# Altium PCB PCB1.PcbDoc (part 1 of 2)
Units mm, origin at the board's own origin, x right, y up, seen from the top; angles counter-clockwise.
Board outline 61.6 x 58.93 mm, 2 copper layers (Top Layer, Bottom Layer); 168 components, 16 nets, 520 pads, 0 vias.
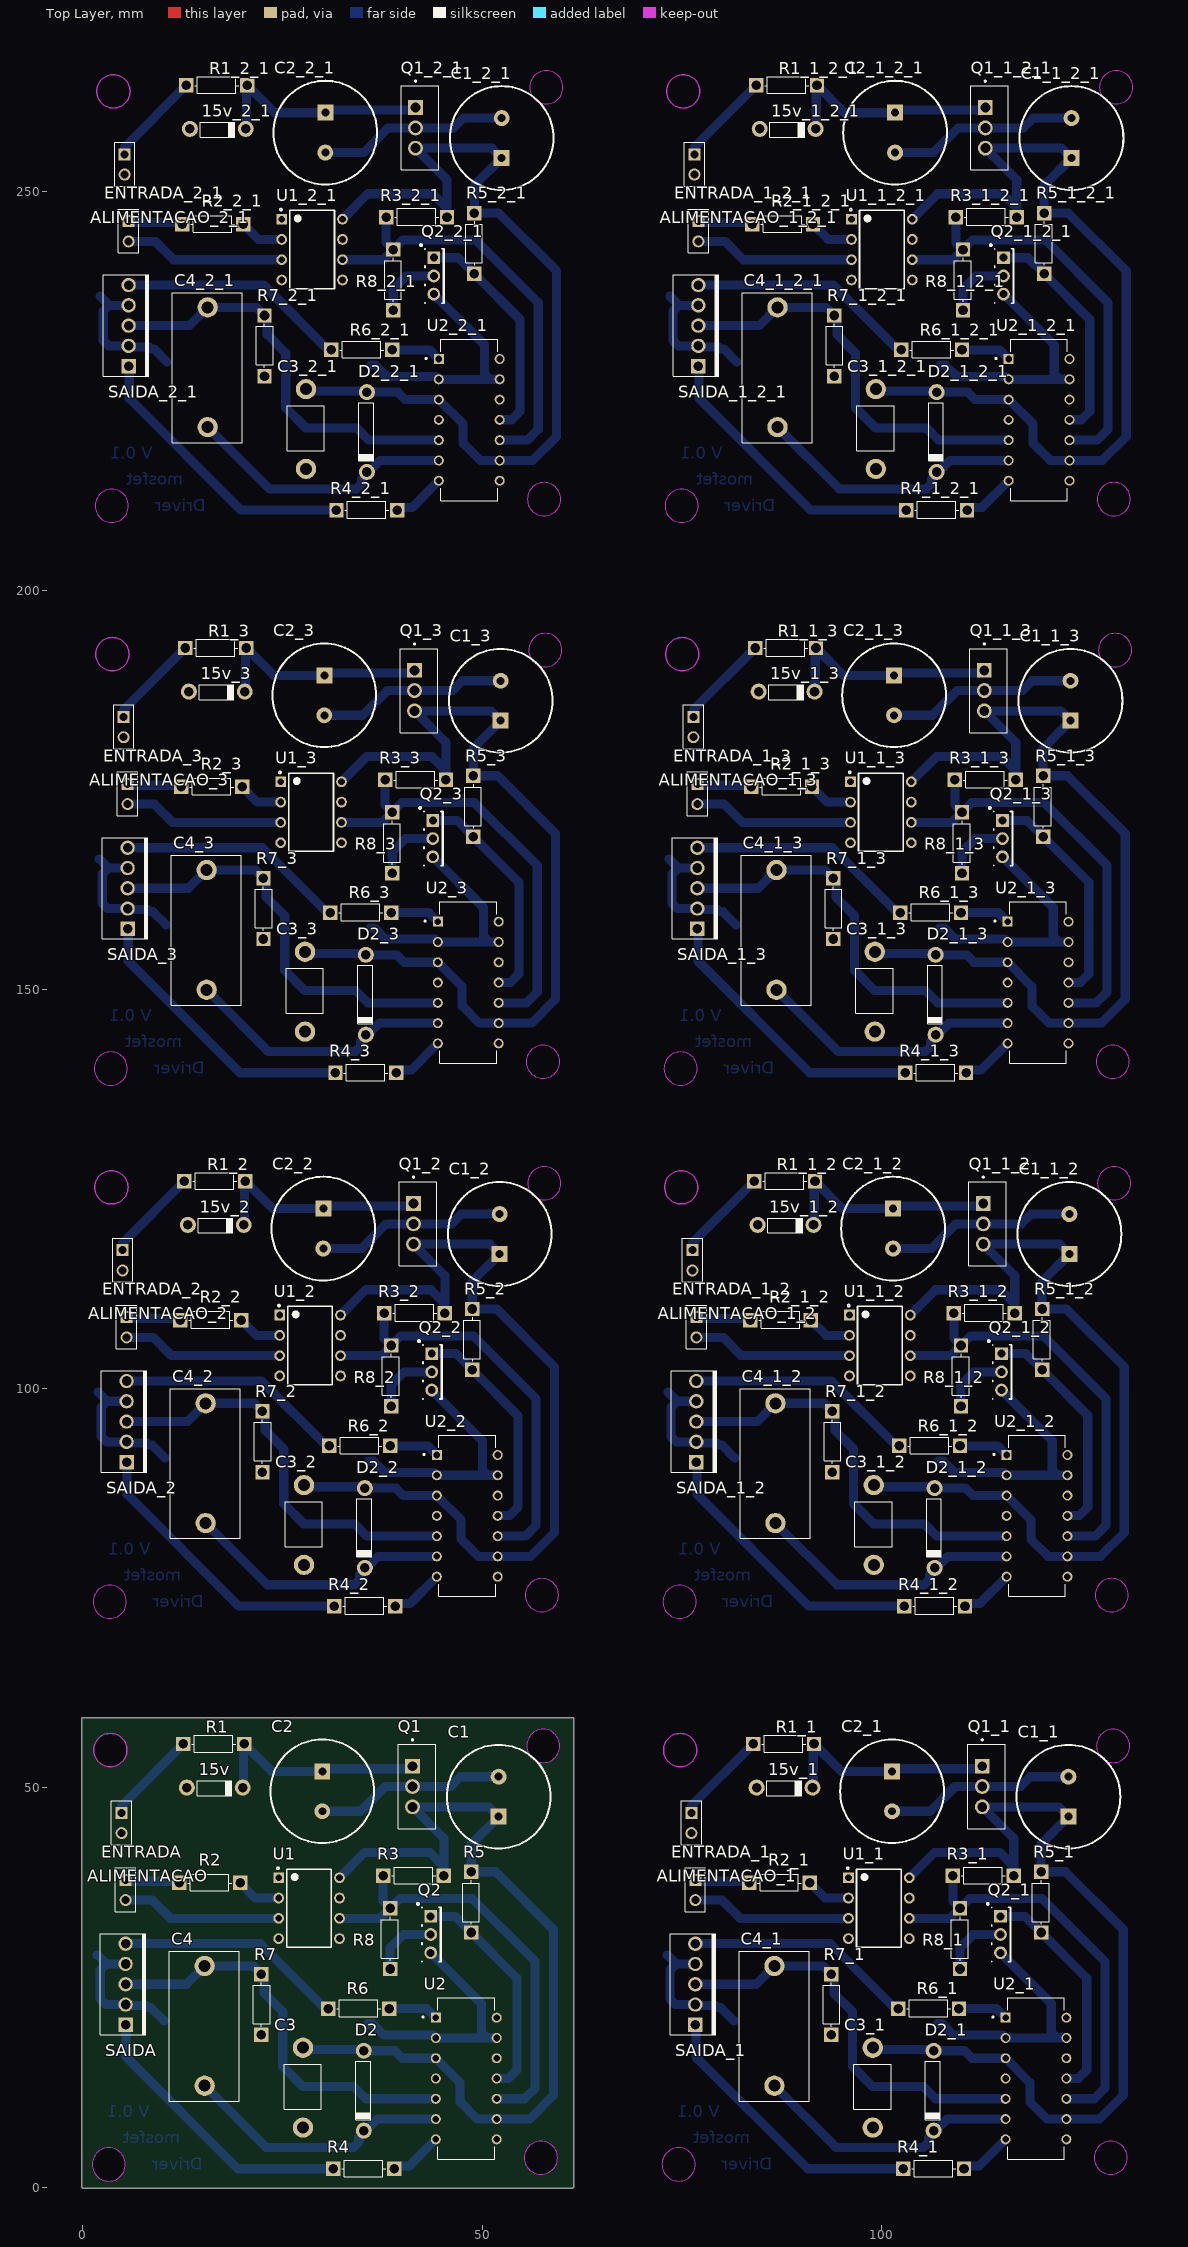
[diagram p0: Top Layer view]
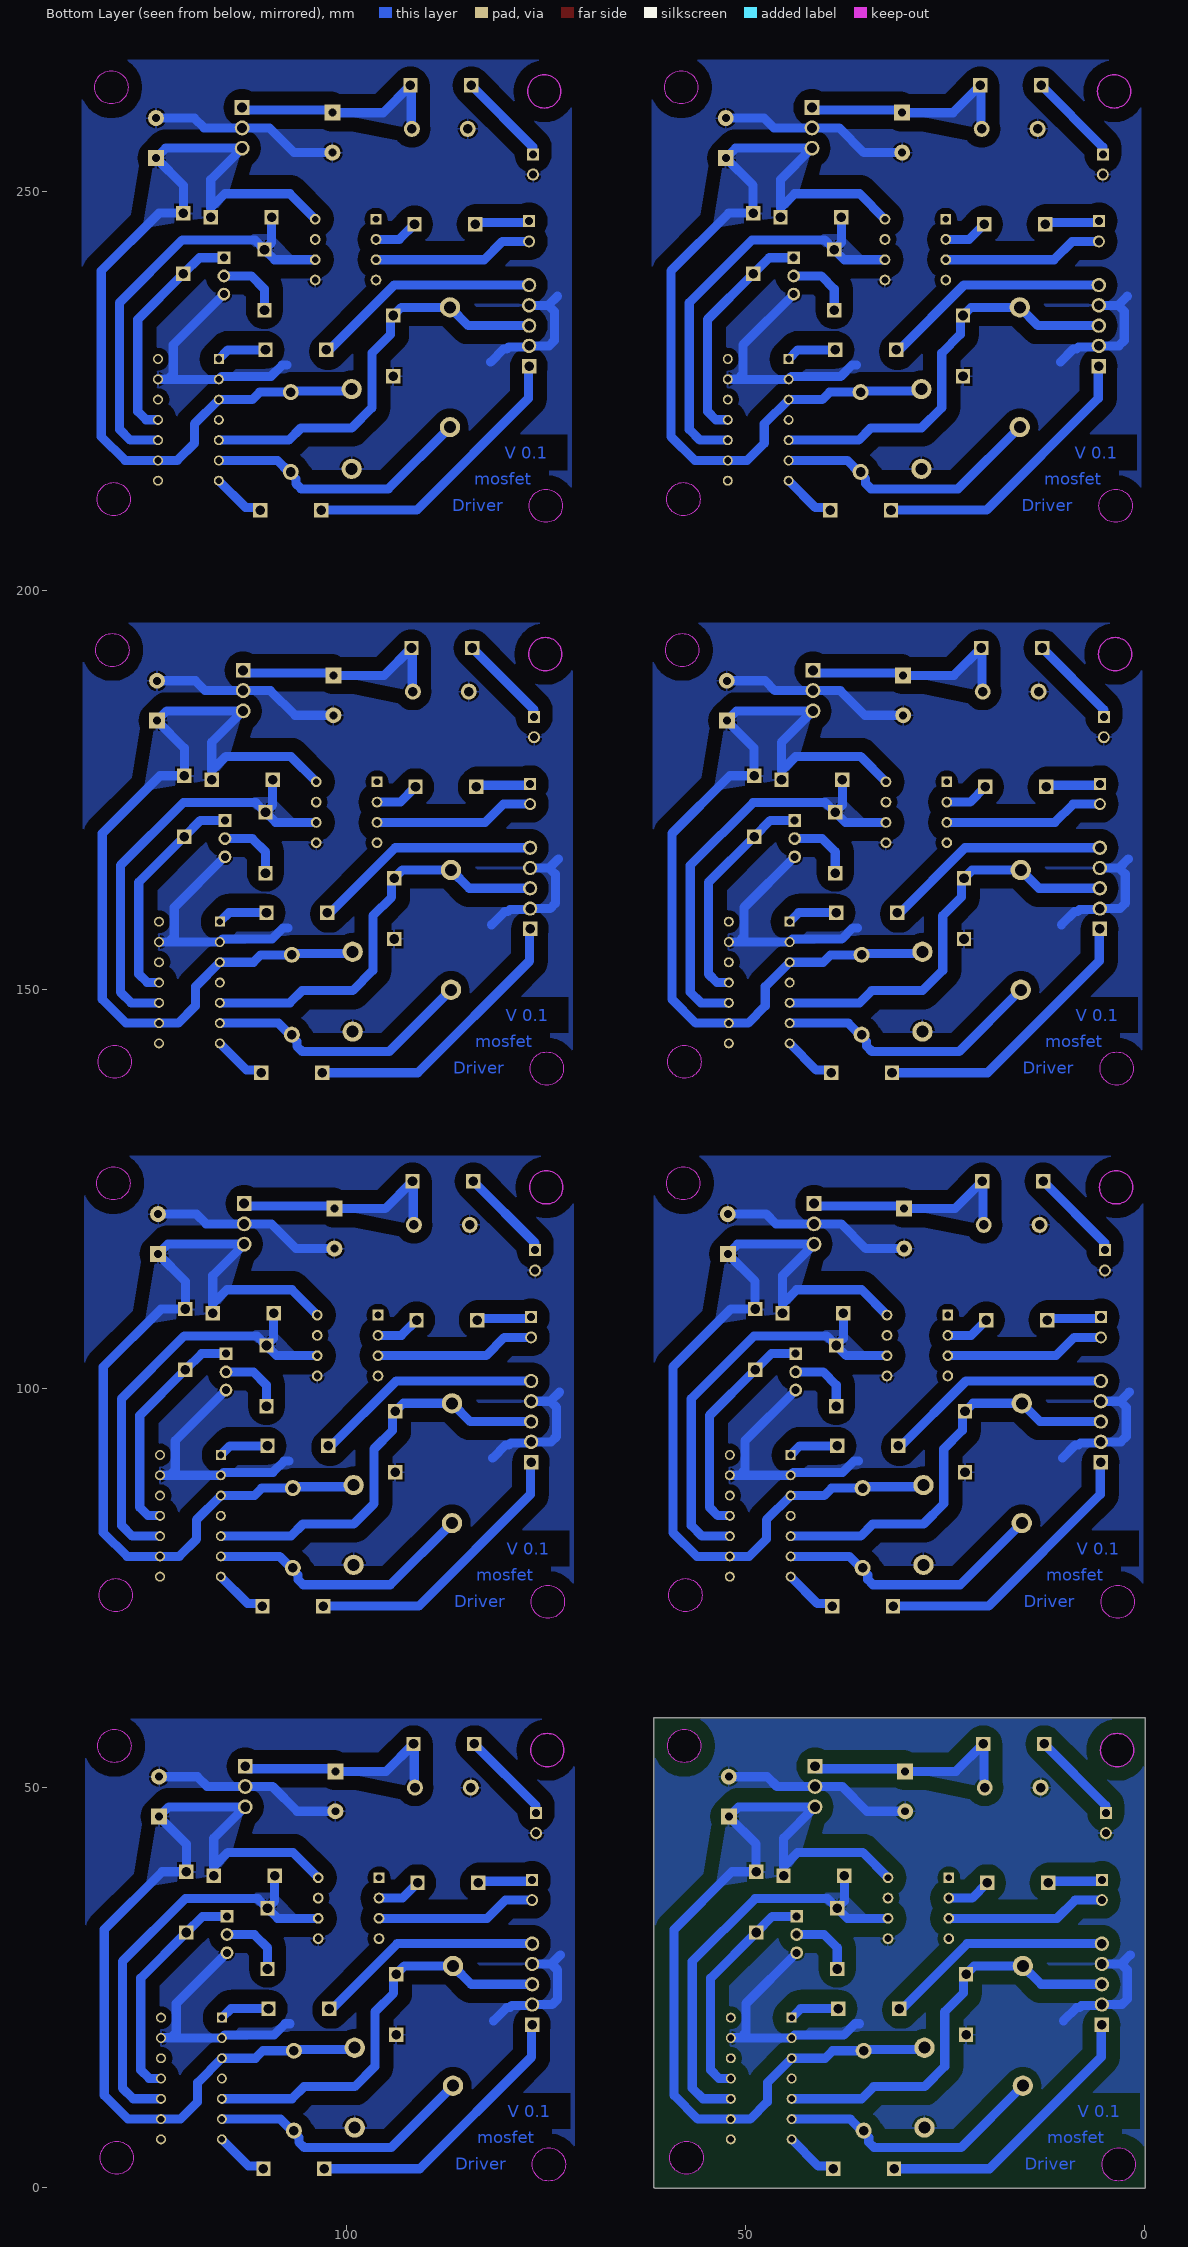
[diagram p1: Bottom Layer view, seen from below]

## Layer stack, top to bottom
Top Solder: solder mask 0.0102, Solder Resist, Dk 3.5
Top Layer: signal copper 0.0356
Dielectric 1: dielectric 0.32, FR-4, Dk 4.8
Bottom Layer: signal copper 0.0356
Bottom Solder: solder mask 0.0102, Solder Resist, Dk 3.5

## Board outline
-0.127,0 -0.127,50.927 -0.127,58.674 cw(c0,58.674) 0,58.801 61.341,58.801 cw(c61.341,58.674) 61.468,58.674 61.468,0 cw(c61.341,0) 61.341,-0.127 0,-0.127 cw(c0,0)
cut-out: 55.54,140.951 ccw(c57.623,140.951) 57.623,138.868 ccw(c57.623,140.951) 59.706,140.951 ccw(c57.623,140.951) 57.623,143.034 ccw(c57.623,140.951)
cut-out: 55.829,192.532 ccw(c57.912,192.532) 57.912,190.449 ccw(c57.912,192.532) 59.995,192.532 ccw(c57.912,192.532) 57.912,194.615 ccw(c57.912,192.532)
cut-out: 55.829,192.532 ccw(c57.912,192.532) 57.912,190.449 ccw(c57.912,192.532) 59.995,192.532 ccw(c57.912,192.532) 57.912,194.615 ccw(c57.912,192.532)
cut-out: 1.405,140.11 ccw(c3.488,140.11) 3.488,138.027 ccw(c3.488,140.11) 5.571,140.11 ccw(c3.488,140.11) 3.488,142.193 ccw(c3.488,140.11)
cut-out: 1.405,140.11 ccw(c3.488,140.11) 3.488,138.027 ccw(c3.488,140.11) 5.571,140.11 ccw(c3.488,140.11) 3.488,142.193 ccw(c3.488,140.11)
cut-out: 1.6,192.024 ccw(c3.683,192.024) 3.683,189.941 ccw(c3.683,192.024) 5.766,192.024 ccw(c3.683,192.024) 3.683,194.107 ccw(c3.683,192.024)
cut-out: 3.683,189.941 cw(c3.683,192.024) 1.6,192.024 cw(c3.683,192.024) 3.683,194.107 cw(c3.683,192.024) 5.766,192.024 cw(c3.683,192.024)
cut-out: 75.057,189.941 cw(c75.057,192.024) 72.974,192.024 cw(c75.057,192.024) 75.057,194.107 cw(c75.057,192.024) 77.14,192.024 cw(c75.057,192.024)
cut-out: 72.974,192.024 ccw(c75.057,192.024) 75.057,189.941 ccw(c75.057,192.024) 77.14,192.024 ccw(c75.057,192.024) 75.057,194.107 ccw(c75.057,192.024)
cut-out: 72.779,140.11 ccw(c74.862,140.11) 74.862,138.027 ccw(c74.862,140.11) 76.945,140.11 ccw(c74.862,140.11) 74.862,142.193 ccw(c74.862,140.11)
cut-out: 72.779,140.11 ccw(c74.862,140.11) 74.862,138.027 ccw(c74.862,140.11) 76.945,140.11 ccw(c74.862,140.11) 74.862,142.193 ccw(c74.862,140.11)
cut-out: 127.203,192.532 ccw(c129.286,192.532) 129.286,190.449 ccw(c129.286,192.532) 131.369,192.532 ccw(c129.286,192.532) 129.286,194.615 ccw(c129.286,192.532)
cut-out: 127.203,192.532 ccw(c129.286,192.532) 129.286,190.449 ccw(c129.286,192.532) 131.369,192.532 ccw(c129.286,192.532) 129.286,194.615 ccw(c129.286,192.532)
cut-out: 126.914,140.951 ccw(c128.997,140.951) 128.997,138.868 ccw(c128.997,140.951) 131.08,140.951 ccw(c128.997,140.951) 128.997,143.034 ccw(c128.997,140.951)
cut-out: 127.041,211.436 ccw(c129.124,211.436) 129.124,209.353 ccw(c129.124,211.436) 131.207,211.436 ccw(c129.124,211.436) 129.124,213.519 ccw(c129.124,211.436)
cut-out: 127.33,263.017 ccw(c129.413,263.017) 129.413,260.934 ccw(c129.413,263.017) 131.496,263.017 ccw(c129.413,263.017) 129.413,265.1 ccw(c129.413,263.017)
cut-out: 127.33,263.017 ccw(c129.413,263.017) 129.413,260.934 ccw(c129.413,263.017) 131.496,263.017 ccw(c129.413,263.017) 129.413,265.1 ccw(c129.413,263.017)
cut-out: 72.906,210.595 ccw(c74.989,210.595) 74.989,208.512 ccw(c74.989,210.595) 77.072,210.595 ccw(c74.989,210.595) 74.989,212.678 ccw(c74.989,210.595)
cut-out: 72.906,210.595 ccw(c74.989,210.595) 74.989,208.512 ccw(c74.989,210.595) 77.072,210.595 ccw(c74.989,210.595) 74.989,212.678 ccw(c74.989,210.595)
cut-out: 73.101,262.509 ccw(c75.184,262.509) 75.184,260.426 ccw(c75.184,262.509) 77.267,262.509 ccw(c75.184,262.509) 75.184,264.592 ccw(c75.184,262.509)
cut-out: 75.184,260.426 cw(c75.184,262.509) 73.101,262.509 cw(c75.184,262.509) 75.184,264.592 cw(c75.184,262.509) 77.267,262.509 cw(c75.184,262.509)
cut-out: 3.81,260.426 cw(c3.81,262.509) 1.727,262.509 cw(c3.81,262.509) 3.81,264.592 cw(c3.81,262.509) 5.893,262.509 cw(c3.81,262.509)
cut-out: 1.727,262.509 ccw(c3.81,262.509) 3.81,260.426 ccw(c3.81,262.509) 5.893,262.509 ccw(c3.81,262.509) 3.81,264.592 ccw(c3.81,262.509)
cut-out: 1.532,210.595 ccw(c3.615,210.595) 3.615,208.512 ccw(c3.615,210.595) 5.698,210.595 ccw(c3.615,210.595) 3.615,212.678 ccw(c3.615,210.595)
cut-out: 1.532,210.595 ccw(c3.615,210.595) 3.615,208.512 ccw(c3.615,210.595) 5.698,210.595 ccw(c3.615,210.595) 3.615,212.678 ccw(c3.615,210.595)
cut-out: 55.956,263.017 ccw(c58.039,263.017) 58.039,260.934 ccw(c58.039,263.017) 60.122,263.017 ccw(c58.039,263.017) 58.039,265.1 ccw(c58.039,263.017)
cut-out: 55.956,263.017 ccw(c58.039,263.017) 58.039,260.934 ccw(c58.039,263.017) 60.122,263.017 ccw(c58.039,263.017) 58.039,265.1 ccw(c58.039,263.017)
cut-out: 55.667,211.436 ccw(c57.75,211.436) 57.75,209.353 ccw(c57.75,211.436) 59.833,211.436 ccw(c57.75,211.436) 57.75,213.519 ccw(c57.75,211.436)
cut-out: 55.413,74.149 ccw(c57.496,74.149) 57.496,72.066 ccw(c57.496,74.149) 59.579,74.149 ccw(c57.496,74.149) 57.496,76.232 ccw(c57.496,74.149)
cut-out: 55.702,125.73 ccw(c57.785,125.73) 57.785,123.647 ccw(c57.785,125.73) 59.868,125.73 ccw(c57.785,125.73) 57.785,127.813 ccw(c57.785,125.73)
cut-out: 55.702,125.73 ccw(c57.785,125.73) 57.785,123.647 ccw(c57.785,125.73) 59.868,125.73 ccw(c57.785,125.73) 57.785,127.813 ccw(c57.785,125.73)
cut-out: 1.278,73.308 ccw(c3.361,73.308) 3.361,71.225 ccw(c3.361,73.308) 5.444,73.308 ccw(c3.361,73.308) 3.361,75.391 ccw(c3.361,73.308)
cut-out: 1.278,73.308 ccw(c3.361,73.308) 3.361,71.225 ccw(c3.361,73.308) 5.444,73.308 ccw(c3.361,73.308) 3.361,75.391 ccw(c3.361,73.308)
cut-out: 1.473,125.222 ccw(c3.556,125.222) 3.556,123.139 ccw(c3.556,125.222) 5.639,125.222 ccw(c3.556,125.222) 3.556,127.305 ccw(c3.556,125.222)
cut-out: 3.556,123.139 cw(c3.556,125.222) 1.473,125.222 cw(c3.556,125.222) 3.556,127.305 cw(c3.556,125.222) 5.639,125.222 cw(c3.556,125.222)
cut-out: 74.93,123.139 cw(c74.93,125.222) 72.847,125.222 cw(c74.93,125.222) 74.93,127.305 cw(c74.93,125.222) 77.013,125.222 cw(c74.93,125.222)
cut-out: 72.847,125.222 ccw(c74.93,125.222) 74.93,123.139 ccw(c74.93,125.222) 77.013,125.222 ccw(c74.93,125.222) 74.93,127.305 ccw(c74.93,125.222)
cut-out: 72.652,73.308 ccw(c74.735,73.308) 74.735,71.225 ccw(c74.735,73.308) 76.818,73.308 ccw(c74.735,73.308) 74.735,75.391 ccw(c74.735,73.308)
cut-out: 72.652,73.308 ccw(c74.735,73.308) 74.735,71.225 ccw(c74.735,73.308) 76.818,73.308 ccw(c74.735,73.308) 74.735,75.391 ccw(c74.735,73.308)
cut-out: 127.076,125.73 ccw(c129.159,125.73) 129.159,123.647 ccw(c129.159,125.73) 131.242,125.73 ccw(c129.159,125.73) 129.159,127.813 ccw(c129.159,125.73)
cut-out: 127.076,125.73 ccw(c129.159,125.73) 129.159,123.647 ccw(c129.159,125.73) 131.242,125.73 ccw(c129.159,125.73) 129.159,127.813 ccw(c129.159,125.73)
cut-out: 126.787,74.149 ccw(c128.87,74.149) 128.87,72.066 ccw(c128.87,74.149) 130.953,74.149 ccw(c128.87,74.149) 128.87,76.232 ccw(c128.87,74.149)
cut-out: 126.66,3.664 ccw(c128.743,3.664) 128.743,1.581 ccw(c128.743,3.664) 130.826,3.664 ccw(c128.743,3.664) 128.743,5.747 ccw(c128.743,3.664)
cut-out: 126.949,55.245 ccw(c129.032,55.245) 129.032,53.162 ccw(c129.032,55.245) 131.115,55.245 ccw(c129.032,55.245) 129.032,57.328 ccw(c129.032,55.245)
cut-out: 126.949,55.245 ccw(c129.032,55.245) 129.032,53.162 ccw(c129.032,55.245) 131.115,55.245 ccw(c129.032,55.245) 129.032,57.328 ccw(c129.032,55.245)
cut-out: 72.525,2.823 ccw(c74.608,2.823) 74.608,0.74 ccw(c74.608,2.823) 76.691,2.823 ccw(c74.608,2.823) 74.608,4.906 ccw(c74.608,2.823)
cut-out: 72.525,2.823 ccw(c74.608,2.823) 74.608,0.74 ccw(c74.608,2.823) 76.691,2.823 ccw(c74.608,2.823) 74.608,4.906 ccw(c74.608,2.823)
cut-out: 72.72,54.737 ccw(c74.803,54.737) 74.803,52.654 ccw(c74.803,54.737) 76.886,54.737 ccw(c74.803,54.737) 74.803,56.82 ccw(c74.803,54.737)
cut-out: 74.803,52.654 cw(c74.803,54.737) 72.72,54.737 cw(c74.803,54.737) 74.803,56.82 cw(c74.803,54.737) 76.886,54.737 cw(c74.803,54.737)
cut-out: 3.429,52.654 cw(c3.429,54.737) 1.346,54.737 cw(c3.429,54.737) 3.429,56.82 cw(c3.429,54.737) 5.512,54.737 cw(c3.429,54.737)
cut-out: 1.346,54.737 ccw(c3.429,54.737) 3.429,52.654 ccw(c3.429,54.737) 5.512,54.737 ccw(c3.429,54.737) 3.429,56.82 ccw(c3.429,54.737)
cut-out: 1.151,2.823 ccw(c3.234,2.823) 3.234,0.74 ccw(c3.234,2.823) 5.317,2.823 ccw(c3.234,2.823) 3.234,4.906 ccw(c3.234,2.823)
cut-out: 1.151,2.823 ccw(c3.234,2.823) 3.234,0.74 ccw(c3.234,2.823) 5.317,2.823 ccw(c3.234,2.823) 3.234,4.906 ccw(c3.234,2.823)
cut-out: 55.575,55.245 ccw(c57.658,55.245) 57.658,53.162 ccw(c57.658,55.245) 59.741,55.245 ccw(c57.658,55.245) 57.658,57.328 ccw(c57.658,55.245)
cut-out: 55.575,55.245 ccw(c57.658,55.245) 57.658,53.162 ccw(c57.658,55.245) 59.741,55.245 ccw(c57.658,55.245) 57.658,57.328 ccw(c57.658,55.245)
cut-out: 55.286,3.664 ccw(c57.369,3.664) 57.369,1.581 ccw(c57.369,3.664) 59.452,3.664 ccw(c57.369,3.664) 57.369,5.747 ccw(c57.369,3.664)

## Design rules (kind name [scope] priority, off if disabled: settings)
Clearance [All] p1: gap=0.254 ignorepadtopadclearanceinfootprint=FALSE except(1.016: Fill-Hole Poly-Hole Region-Hole; 1.27: Fill-Text Poly-Text Region-Text; 1.778: Arc-Fill Arc-Poly Arc-Region Track-Fill Track-Poly Track-Region Fill-Fill Fill-Poly Fill-Region Poly-Poly Poly-Region Region-Region)
PolygonConnect [All] p1: connectstyle=Relief reliefconductorwidth=0.254 reliefentries=4 polygonreliefangle="90 Angle" airgapwidth=0.254
RoutingVias [All] p1: holewidth=0.711 width=1.27 viastyle="Through Hole" minholewidth=0.711 minwidth=1.27 maxholewidth=0.711 maxwidth=1.27
SolderMaskExpansion [All] p1: expansion=0.102
Width [All] p1: maxlimit=1.27 minlimit=0.254 preferedwidth=1.143 toplayer_maxwidth=0.254 toplayer_prefwidth=0.254 bottomlayer_minwidth=1.016 minimp=50.000000 maximp=50.000000 favimp=50.000000
30 further rules are at their usual default settings.

## Classes and differential pairs
component class Sheet1: 15v ALIMENTACAO C2 C3 C4 D2 ENTRADA Q1 Q2 R1 R2 R3 R4 R5 R6 R7 R8 SAIDA U1 U2

## Components (designator, comment, footprint, x,y, rotation, side; value= is the part's Value field where it differs from the comment)
15v "DIO_ZENER_DO35" DIO_PTH_DO35 16.51,50.038 r180 top value=?
15v_1 "DIO_ZENER_DO35" DIO_PTH_DO35 87.884,50.038 r180 top value=? (schematic designator 15v)
15v_1_2 "DIO_ZENER_DO35" DIO_PTH_DO35 88.011,120.523 r180 top value=? (schematic designator 15v)
15v_1_2_1 "DIO_ZENER_DO35" DIO_PTH_DO35 88.265,257.81 r180 top value=? (schematic designator 15v)
15v_1_3 "DIO_ZENER_DO35" DIO_PTH_DO35 88.138,187.325 r180 top value=? (schematic designator 15v)
15v_2 "DIO_ZENER_DO35" DIO_PTH_DO35 16.637,120.523 r180 top value=? (schematic designator 15v)
15v_2_1 "DIO_ZENER_DO35" DIO_PTH_DO35 16.891,257.81 r180 top value=? (schematic designator 15v)
15v_3 "DIO_ZENER_DO35" DIO_PTH_DO35 16.764,187.325 r180 top value=? (schematic designator 15v)
ALIMENTACAO "Entrada" HEADER_1X2 4.84,45.593 r270 top value=?
ALIMENTACAO_1 "Entrada" HEADER_1X2 76.214,45.593 r270 top value=? (schematic designator ALIMENTACAO)
ALIMENTACAO_1_2 "Entrada" HEADER_1X2 76.341,116.078 r270 top value=? (schematic designator ALIMENTACAO)
ALIMENTACAO_1_2_1 "Entrada" HEADER_1X2 76.595,253.365 r270 top value=? (schematic designator ALIMENTACAO)
ALIMENTACAO_1_3 "Entrada" HEADER_1X2 76.468,182.88 r270 top value=? (schematic designator ALIMENTACAO)
ALIMENTACAO_2 "Entrada" HEADER_1X2 4.967,116.078 r270 top value=? (schematic designator ALIMENTACAO)
ALIMENTACAO_2_1 "Entrada" HEADER_1X2 5.221,253.365 r270 top value=? (schematic designator ALIMENTACAO)
ALIMENTACAO_3 "Entrada" HEADER_1X2 5.094,182.88 r270 top value=? (schematic designator ALIMENTACAO)
C1 "Electrolytic Capacitor" CAP_ALU_RADIAL_5MM 52.07,48.895 r90 top value=10F
C1_1 "Electrolytic Capacitor" CAP_ALU_RADIAL_5MM 123.444,48.895 r90 top value=10F (schematic designator C1)
C1_1_2 "Electrolytic Capacitor" CAP_ALU_RADIAL_5MM 123.571,119.38 r90 top value=10F (schematic designator C1)
C1_1_2_1 "Electrolytic Capacitor" CAP_ALU_RADIAL_5MM 123.825,256.667 r90 top value=10F (schematic designator C1)
C1_1_3 "Electrolytic Capacitor" CAP_ALU_RADIAL_5MM 123.698,186.182 r90 top value=10F (schematic designator C1)
C1_2 "Electrolytic Capacitor" CAP_ALU_RADIAL_5MM 52.197,119.38 r90 top value=10F (schematic designator C1)
C1_2_1 "Electrolytic Capacitor" CAP_ALU_RADIAL_5MM 52.451,256.667 r90 top value=10F (schematic designator C1)
C1_3 "Electrolytic Capacitor" CAP_ALU_RADIAL_5MM 52.324,186.182 r90 top value=10F (schematic designator C1)
C2 "Electrolytic Capacitor" CAP_ALU_RADIAL_5MM 29.972,49.57 r270 top value=10F
C2_1 "Electrolytic Capacitor" CAP_ALU_RADIAL_5MM 101.346,49.57 r270 top value=10F (schematic designator C2)
C2_1_2 "Electrolytic Capacitor" CAP_ALU_RADIAL_5MM 101.473,120.055 r270 top value=10F (schematic designator C2)
C2_1_2_1 "Electrolytic Capacitor" CAP_ALU_RADIAL_5MM 101.727,257.342 r270 top value=10F (schematic designator C2)
C2_1_3 "Electrolytic Capacitor" CAP_ALU_RADIAL_5MM 101.6,186.857 r270 top value=10F (schematic designator C2)
C2_2 "Electrolytic Capacitor" CAP_ALU_RADIAL_5MM 30.099,120.055 r270 top value=10F (schematic designator C2)
C2_2_1 "Electrolytic Capacitor" CAP_ALU_RADIAL_5MM 30.353,257.342 r270 top value=10F (schematic designator C2)
C2_3 "Electrolytic Capacitor" CAP_ALU_RADIAL_5MM 30.226,186.857 r270 top value=10F (schematic designator C2)
C3 "CAP_POL_RADIAL_16MM" Cap_POL_RADIAL_10mm 27.559,12.446 r270 top value=0.1nF
C3_1 "CAP_POL_RADIAL_16MM" Cap_POL_RADIAL_10mm 98.933,12.446 r270 top value=0.1nF (schematic designator C3)
C3_1_2 "CAP_POL_RADIAL_16MM" Cap_POL_RADIAL_10mm 99.06,82.931 r270 top value=0.1nF (schematic designator C3)
C3_1_2_1 "CAP_POL_RADIAL_16MM" Cap_POL_RADIAL_10mm 99.314,220.218 r270 top value=0.1nF (schematic designator C3)
C3_1_3 "CAP_POL_RADIAL_16MM" Cap_POL_RADIAL_10mm 99.187,149.733 r270 top value=0.1nF (schematic designator C3)
C3_2 "CAP_POL_RADIAL_16MM" Cap_POL_RADIAL_10mm 27.686,82.931 r270 top value=0.1nF (schematic designator C3)
C3_2_1 "CAP_POL_RADIAL_16MM" Cap_POL_RADIAL_10mm 27.94,220.218 r270 top value=0.1nF (schematic designator C3)
C3_3 "CAP_POL_RADIAL_16MM" Cap_POL_RADIAL_10mm 27.813,149.733 r270 top value=0.1nF (schematic designator C3)
C4 "CAP_POL_RADIAL_25.5MM" CAP_POL_RADIAL_16MM 15.24,12.686 r90 top value=330nF
C4_1 "CAP_POL_RADIAL_25.5MM" CAP_POL_RADIAL_16MM 86.614,12.686 r90 top value=330nF (schematic designator C4)
C4_1_2 "CAP_POL_RADIAL_25.5MM" CAP_POL_RADIAL_16MM 86.741,83.171 r90 top value=330nF (schematic designator C4)
C4_1_2_1 "CAP_POL_RADIAL_25.5MM" CAP_POL_RADIAL_16MM 86.995,220.458 r90 top value=330nF (schematic designator C4)
C4_1_3 "CAP_POL_RADIAL_25.5MM" CAP_POL_RADIAL_16MM 86.868,149.973 r90 top value=330nF (schematic designator C4)
C4_2 "CAP_POL_RADIAL_25.5MM" CAP_POL_RADIAL_16MM 15.367,83.171 r90 top value=330nF (schematic designator C4)
C4_2_1 "CAP_POL_RADIAL_25.5MM" CAP_POL_RADIAL_16MM 15.621,220.458 r90 top value=330nF (schematic designator C4)
C4_3 "CAP_POL_RADIAL_25.5MM" CAP_POL_RADIAL_16MM 15.494,149.973 r90 top value=330nF (schematic designator C4)
D2 "DIO_PTH_1N4007" DIO_PTH_DO41 35.179,12.065 r90 top value=?
D2_1 "DIO_PTH_1N4007" DIO_PTH_DO41 106.553,12.065 r90 top value=? (schematic designator D2)
D2_1_2 "DIO_PTH_1N4007" DIO_PTH_DO41 106.68,82.55 r90 top value=? (schematic designator D2)
D2_1_2_1 "DIO_PTH_1N4007" DIO_PTH_DO41 106.934,219.837 r90 top value=? (schematic designator D2)
D2_1_3 "DIO_PTH_1N4007" DIO_PTH_DO41 106.807,149.352 r90 top value=? (schematic designator D2)
D2_2 "DIO_PTH_1N4007" DIO_PTH_DO41 35.306,82.55 r90 top value=? (schematic designator D2)
D2_2_1 "DIO_PTH_1N4007" DIO_PTH_DO41 35.56,219.837 r90 top value=? (schematic designator D2)
D2_3 "DIO_PTH_1N4007" DIO_PTH_DO41 35.433,149.352 r90 top value=? (schematic designator D2)
ENTRADA "IN_H" HEADER_1X2 5.334,37.211 r270 top value=?
ENTRADA_1 "IN_H" HEADER_1X2 76.708,37.211 r270 top value=? (schematic designator ENTRADA)
ENTRADA_1_2 "IN_H" HEADER_1X2 76.835,107.696 r270 top value=? (schematic designator ENTRADA)
ENTRADA_1_2_1 "IN_H" HEADER_1X2 77.089,244.983 r270 top value=? (schematic designator ENTRADA)
ENTRADA_1_3 "IN_H" HEADER_1X2 76.962,174.498 r270 top value=? (schematic designator ENTRADA)
ENTRADA_2 "IN_H" HEADER_1X2 5.461,107.696 r270 top value=? (schematic designator ENTRADA)
ENTRADA_2_1 "IN_H" HEADER_1X2 5.715,244.983 r270 top value=? (schematic designator ENTRADA)
ENTRADA_3 "IN_H" HEADER_1X2 5.588,174.498 r270 top value=? (schematic designator ENTRADA)
Q1 "LM7812CT/NOPB" *TO254P1054X470X2600-3 41.275,52.705 r270 top
Q1_1 "LM7812CT/NOPB" *TO254P1054X470X2600-3 112.649,52.705 r270 top (schematic designator Q1)
Q1_1_2 "LM7812CT/NOPB" *TO254P1054X470X2600-3 112.776,123.19 r270 top (schematic designator Q1)
Q1_1_2_1 "LM7812CT/NOPB" *TO254P1054X470X2600-3 113.03,260.477 r270 top (schematic designator Q1)
Q1_1_3 "LM7812CT/NOPB" *TO254P1054X470X2600-3 112.903,189.992 r270 top (schematic designator Q1)
Q1_2 "LM7812CT/NOPB" *TO254P1054X470X2600-3 41.402,123.19 r270 top (schematic designator Q1)
Q1_2_1 "LM7812CT/NOPB" *TO254P1054X470X2600-3 41.656,260.477 r270 top (schematic designator Q1)
Q1_3 "LM7812CT/NOPB" *TO254P1054X470X2600-3 41.529,189.992 r270 top (schematic designator Q1)
Q2 "NPN" 369-03 43.561,31.623 r270 top
Q2_1 "NPN" 369-03 114.935,31.623 r270 top (schematic designator Q2)
Q2_1_2 "NPN" 369-03 115.062,102.108 r270 top (schematic designator Q2)
Q2_1_2_1 "NPN" 369-03 115.316,239.395 r270 top (schematic designator Q2)
Q2_1_3 "NPN" 369-03 115.189,168.91 r270 top (schematic designator Q2)
Q2_2 "NPN" 369-03 43.688,102.108 r270 top (schematic designator Q2)
Q2_2_1 "NPN" 369-03 43.942,239.395 r270 top (schematic designator Q2)
Q2_3 "NPN" 369-03 43.815,168.91 r270 top (schematic designator Q2)
R1 "2k2" RES_PTH_7.62MM 16.383,55.499 r0 top
R1_1 "2k2" RES_PTH_7.62MM 87.757,55.499 r0 top (schematic designator R1)
R1_1_2 "2k2" RES_PTH_7.62MM 87.884,125.984 r0 top (schematic designator R1)
R1_1_2_1 "2k2" RES_PTH_7.62MM 88.138,263.271 r0 top (schematic designator R1)
R1_1_3 "2k2" RES_PTH_7.62MM 88.011,192.786 r0 top (schematic designator R1)
R1_2 "2k2" RES_PTH_7.62MM 16.51,125.984 r0 top (schematic designator R1)
R1_2_1 "2k2" RES_PTH_7.62MM 16.764,263.271 r0 top (schematic designator R1)
R1_3 "2k2" RES_PTH_7.62MM 16.637,192.786 r0 top (schematic designator R1)
R2 "150" RES_PTH_7.62MM 15.875,38.1 r0 top
R2_1 "150" RES_PTH_7.62MM 87.249,38.1 r0 top (schematic designator R2)
R2_1_2 "150" RES_PTH_7.62MM 87.376,108.585 r0 top (schematic designator R2)
R2_1_2_1 "150" RES_PTH_7.62MM 87.63,245.872 r0 top (schematic designator R2)
R2_1_3 "150" RES_PTH_7.62MM 87.503,175.387 r0 top (schematic designator R2)
R2_2 "150" RES_PTH_7.62MM 16.002,108.585 r0 top (schematic designator R2)
R2_2_1 "150" RES_PTH_7.62MM 16.256,245.872 r0 top (schematic designator R2)
R2_3 "150" RES_PTH_7.62MM 16.129,175.387 r0 top (schematic designator R2)
R3 "1k5" RES_PTH_7.62MM 41.402,38.989 r0 top
R3_1 "1k5" RES_PTH_7.62MM 112.776,38.989 r0 top (schematic designator R3)
R3_1_2 "1k5" RES_PTH_7.62MM 112.903,109.474 r0 top (schematic designator R3)
R3_1_2_1 "1k5" RES_PTH_7.62MM 113.157,246.761 r0 top (schematic designator R3)
R3_1_3 "1k5" RES_PTH_7.62MM 113.03,176.276 r0 top (schematic designator R3)
R3_2 "1k5" RES_PTH_7.62MM 41.529,109.474 r0 top (schematic designator R3)
R3_2_1 "1k5" RES_PTH_7.62MM 41.783,246.761 r0 top (schematic designator R3)
R3_3 "1k5" RES_PTH_7.62MM 41.656,176.276 r0 top (schematic designator R3)
R4 "75" RES_PTH_7.62MM 35.179,2.286 r0 top
R4_1 "75" RES_PTH_7.62MM 106.553,2.286 r0 top (schematic designator R4)
R4_1_2 "75" RES_PTH_7.62MM 106.68,72.771 r0 top (schematic designator R4)
R4_1_2_1 "75" RES_PTH_7.62MM 106.934,210.058 r0 top (schematic designator R4)
R4_1_3 "75" RES_PTH_7.62MM 106.807,139.573 r0 top (schematic designator R4)
R4_2 "75" RES_PTH_7.62MM 35.306,72.771 r0 top (schematic designator R4)
R4_2_1 "75" RES_PTH_7.62MM 35.56,210.058 r0 top (schematic designator R4)
R4_3 "75" RES_PTH_7.62MM 35.433,139.573 r0 top (schematic designator R4)
R5 "10k" RES_PTH_7.62MM 48.641,35.687 r90 top
R5_1 "10k" RES_PTH_7.62MM 120.015,35.687 r90 top (schematic designator R5)
R5_1_2 "10k" RES_PTH_7.62MM 120.142,106.172 r90 top (schematic designator R5)
R5_1_2_1 "10k" RES_PTH_7.62MM 120.396,243.459 r90 top (schematic designator R5)
R5_1_3 "10k" RES_PTH_7.62MM 120.269,172.974 r90 top (schematic designator R5)
R5_2 "10k" RES_PTH_7.62MM 48.768,106.172 r90 top (schematic designator R5)
R5_2_1 "10k" RES_PTH_7.62MM 49.022,243.459 r90 top (schematic designator R5)
R5_3 "10k" RES_PTH_7.62MM 48.895,172.974 r90 top (schematic designator R5)
R6 "75" RES_PTH_7.62MM 34.544,22.352 r0 top
R6_1 "75" RES_PTH_7.62MM 105.918,22.352 r0 top (schematic designator R6)
R6_1_2 "75" RES_PTH_7.62MM 106.045,92.837 r0 top (schematic designator R6)
R6_1_2_1 "75" RES_PTH_7.62MM 106.299,230.124 r0 top (schematic designator R6)
R6_1_3 "75" RES_PTH_7.62MM 106.172,159.639 r0 top (schematic designator R6)
R6_2 "75" RES_PTH_7.62MM 34.671,92.837 r0 top (schematic designator R6)
R6_2_1 "75" RES_PTH_7.62MM 34.925,230.124 r0 top (schematic designator R6)
R6_3 "75" RES_PTH_7.62MM 34.798,159.639 r0 top (schematic designator R6)
R7 "10k" RES_PTH_7.62MM 22.352,22.86 r270 top
R7_1 "10k" RES_PTH_7.62MM 93.726,22.86 r270 top (schematic designator R7)
R7_1_2 "10k" RES_PTH_7.62MM 93.853,93.345 r270 top (schematic designator R7)
R7_1_2_1 "10k" RES_PTH_7.62MM 94.107,230.632 r270 top (schematic designator R7)
R7_1_3 "10k" RES_PTH_7.62MM 93.98,160.147 r270 top (schematic designator R7)
R7_2 "10k" RES_PTH_7.62MM 22.479,93.345 r270 top (schematic designator R7)
R7_2_1 "10k" RES_PTH_7.62MM 22.733,230.632 r270 top (schematic designator R7)
R7_3 "10k" RES_PTH_7.62MM 22.606,160.147 r270 top (schematic designator R7)
R8 "1k" RES_PTH_7.62MM 38.481,31.115 r90 top
R8_1 "1k" RES_PTH_7.62MM 109.855,31.115 r90 top (schematic designator R8)
R8_1_2 "1k" RES_PTH_7.62MM 109.982,101.6 r90 top (schematic designator R8)
R8_1_2_1 "1k" RES_PTH_7.62MM 110.236,238.887 r90 top (schematic designator R8)
R8_1_3 "1k" RES_PTH_7.62MM 110.109,168.402 r90 top (schematic designator R8)
R8_2 "1k" RES_PTH_7.62MM 38.608,101.6 r90 top (schematic designator R8)
R8_2_1 "1k" RES_PTH_7.62MM 38.862,238.887 r90 top (schematic designator R8)
R8_3 "1k" RES_PTH_7.62MM 38.735,168.402 r90 top (schematic designator R8)
SAIDA "Saída" CN_KK_5_5045-5 5.334,25.4 r90 top value=?
SAIDA_1 "Saída" CN_KK_5_5045-5 76.708,25.4 r90 top value=? (schematic designator SAIDA)
SAIDA_1_2 "Saída" CN_KK_5_5045-5 76.835,95.885 r90 top value=? (schematic designator SAIDA)
SAIDA_1_2_1 "Saída" CN_KK_5_5045-5 77.089,233.172 r90 top value=? (schematic designator SAIDA)
SAIDA_1_3 "Saída" CN_KK_5_5045-5 76.962,162.687 r90 top value=? (schematic designator SAIDA)
SAIDA_2 "Saída" CN_KK_5_5045-5 5.461,95.885 r90 top value=? (schematic designator SAIDA)
SAIDA_2_1 "Saída" CN_KK_5_5045-5 5.715,233.172 r90 top value=? (schematic designator SAIDA)
SAIDA_3 "Saída" CN_KK_5_5045-5 5.588,162.687 r90 top value=? (schematic designator SAIDA)
U1 "6N136" *DIP762W50P254L977H451Q8 28.321,34.925 r0 top
U1_1 "6N136" *DIP762W50P254L977H451Q8 99.695,34.925 r0 top (schematic designator U1)
U1_1_2 "6N136" *DIP762W50P254L977H451Q8 99.822,105.41 r0 top (schematic designator U1)
U1_1_2_1 "6N136" *DIP762W50P254L977H451Q8 100.076,242.697 r0 top (schematic designator U1)
U1_1_3 "6N136" *DIP762W50P254L977H451Q8 99.949,172.212 r0 top (schematic designator U1)
U1_2 "6N136" *DIP762W50P254L977H451Q8 28.448,105.41 r0 top (schematic designator U1)
U1_2_1 "6N136" *DIP762W50P254L977H451Q8 28.702,242.697 r0 top (schematic designator U1)
U1_3 "6N136" *DIP762W50P254L977H451Q8 28.575,172.212 r0 top (schematic designator U1)
U2 "IR2110" *DIP762W45P254L2019H533Q14 48.006,13.589 r0 top
U2_1 "IR2110" *DIP762W45P254L2019H533Q14 119.38,13.589 r0 top (schematic designator U2)
U2_1_2 "IR2110" *DIP762W45P254L2019H533Q14 119.507,84.074 r0 top (schematic designator U2)
U2_1_2_1 "IR2110" *DIP762W45P254L2019H533Q14 119.761,221.361 r0 top (schematic designator U2)
U2_1_3 "IR2110" *DIP762W45P254L2019H533Q14 119.634,150.876 r0 top (schematic designator U2)
U2_2 "IR2110" *DIP762W45P254L2019H533Q14 48.133,84.074 r0 top (schematic designator U2)
U2_2_1 "IR2110" *DIP762W45P254L2019H533Q14 48.387,221.361 r0 top (schematic designator U2)
U2_3 "IR2110" *DIP762W45P254L2019H533Q14 48.26,150.876 r0 top (schematic designator U2)

## Footprints (in the part's own frame and the unit in brackets; to place one, negate y for a bottom-side part, rotate by r counter-clockwise, add the part's x,y. Pads: shape width x height; smd on the part's side, far side on the other; paste and mask are expansions set on the pad)
369-03 [mm] "TO, Thru-Hole, Vertical, Heatsink Mounted; 3 In-Line Leads; Pitch 2.28 mm"
  rect 1.6x1.6 hole 1: 1(-2.28,0)
  round 1.6 hole 1: 2(0,0) 3(2.28,0)
  silkscreen extent -3.97,-1.72 3.4,1.3, body extent -3.45,-1.15 3.45,1.35, height 9.7
*DIP762W45P254L2019H533Q14 [mm]
  rect 1.25x1.25 hole 0.83: 1(-3.81,7.62)
  round 1.25 hole 0.83: 2(-3.81,5.08) 3(-3.81,2.54) 4(-3.81,0) 5(-3.81,-2.54) 6(-3.81,-5.08) 7(-3.81,-7.62) 8(3.81,-7.62) 9(3.81,-5.08) 10(3.81,-2.54) 11(3.81,0) 12(3.81,2.54) 13(3.81,5.08) 14(3.81,7.62)
  silkscreen extent -5.5,-10.1 3.56,10.1
*DIP762W50P254L977H451Q8 [mm]
  rect 1.35x1.35 hole 0.85: 1(-3.81,3.81)
  round 1.35 hole 0.85: 2(-3.81,1.27) 3(-3.81,-1.27) 4(-3.81,-3.81) 5(3.81,-3.81) 6(3.81,-1.27) 7(3.81,1.27) 8(3.81,3.81)
  silkscreen extent -4.04,-4.9 2.8,5.14
*TO254P1054X470X2600-3 [mm]
  rect 1.86x1.86 hole 1.24: 1(0,0)
  round 1.86 hole 1.24: 2(2.54,0) 3(5.08,0)
  silkscreen extent -3.41,-1.8 7.81,2.9
CAP_ALU_RADIAL_5MM [mm]
  rect 2x2 hole 1: 1(-2.5,0)
  round 2 hole 1: 2(2.5,0)
  silkscreen extent -6.5,-6.5 6.5,6.5, body extent -6.19,-6.18 6.29,6.32, height 20
Cap_POL_RADIAL_10mm [mm] "pitch : 10mm"
  round 2.54 hole 1.5: 1(-5,0) 2(5,0)
  silkscreen extent -2.94,-2.36 2.7,2.31, body extent -5.91,-3.84 6.09,3.66, height 14.32
CAP_POL_RADIAL_16MM [mm] "16 mm Pitch"
  round 2.54 hole 1.5: 1(0,0) 2(15,0)
  silkscreen extent -1.93,-4.34 16.84,4.42, body extent -1.78,-4.25 16.72,4.25, height 16.5
CN_KK_5_5045-5 [mm]
  rect 1.8x1.8 hole 1.2: 1(-5.08,0)
  round 1.8 hole 1.2: 2(-2.54,0) 3(0,0) 4(2.54,0) 5(5.08,0)
  silkscreen extent -6.35,-2.54 6.35,3.18, body extent -6.35,-2.87 6.35,6.77, height 11.11
DIO_PTH_DO35 [mm]
  round 2 hole 1.2: A(3.5,0) K(-3.5,0)
  silkscreen extent -2.12,-0.86 2.21,1.07, body extent -4.11,-0.86 4.07,1.06, height 1.96
DIO_PTH_DO41 [mm]
  round 2 hole 1.2: A(5,0) K(-5,0)
  silkscreen extent -3.62,-0.86 3.69,1.02, body extent -5.65,-1.36 5.71,1.36, height 1.36
HEADER_1X2 [mm]
  rect 1.5x1.5 hole 1: 1(-1.27,0)
  round 1.5 hole 1: 2(1.27,0)
  silkscreen extent -2.79,-1.27 2.71,1.27, body extent -2.44,-1.34 2.64,1.2, height 8.5
RES_PTH_7.62MM [mm]
  rect 1.8x1.8 hole 1.2: 1(-3.81,0) 2(3.81,0)
  silkscreen extent -2.76,-1.01 2.76,1.09, body extent -4.06,-1.15 4.16,1.25, height 3.2

## Part data
ALIMENTACAO ALIMENTACAO_1 ALIMENTACAO_1_2 ALIMENTACAO_1_2_1 ALIMENTACAO_1_3 ALIMENTACAO_2 ALIMENTACAO_2_1 ALIMENTACAO_3 ENTRADA ENTRADA_1 ENTRADA_1_2 ENTRADA_1_2_1 ENTRADA_1_3 ENTRADA_2 ENTRADA_2_1 ENTRADA_3: library part CN_MKDS_2, "MKDS_2"
C1 C1_1 C1_1_2 C1_1_2_1 C1_1_3 C1_2 C1_2_1 C1_3 C2 C2_1 C2_1_2 C2_1_2_1 C2_1_3 C2_2 C2_2_1 C2_3: library part CAP_ALU_RADIAL_5MM, "PTH Radial Electrolytic Capacitor", Tensão=?
C3 C3_1 C3_1_2 C3_1_2_1 C3_1_3 C3_2 C3_2_1 C3_3 C4 C4_1 C4_1_2 C4_1_2_1 C4_1_3 C4_2 C4_2_1 C4_3: "PTH Radial Polyester Capacitor", Tensão=?
Q1 Q1_1 Q1_1_2 Q1_1_2_1 Q1_1_3 Q1_2 Q1_2_1 Q1_3: library part LM7805CT/NOPB, "Linear Voltage Regulator IC Positive Fixed 1 Output 1A TO-220-3", Package="TO-220 ON Semiconductor", Availability=Unavailable, MF="ON Semiconductor", MP=LM7805CT, Price=None, SnapEDA_Link=https://www.snapeda.com/parts/LM7805CT/ON%20Semiconductor/view-part/546231/?ref=snap
Q2 Q2_1 Q2_1_2 Q2_1_2_1 Q2_1_3 Q2_2 Q2_2_1 Q2_3: "NPN Bipolar Transistor", Code_JEDEC=TO-226-AA, LatestRevisionDate=17-Jul-2002, LatestRevisionNote="Re-released for DXP Platform.", PackageDescription="TO, Flat Index; 3 In-Line, Axial Leads; Body Dia. 4.8mm; Leads 0.55 x 0.51 mm (max)", PackageReference=TO-226-AA, Published=8-Jun-2000, Publisher="Altium Limited"
R1 R1_1 R1_1_2 R1_1_2_1 R1_1_3 R1_2 R1_2_1 R1_3: library part RES_PTH_7.62MM, "Pin Through Hole Resistor 7.62mm"
R2 R2_1 R2_1_2 R2_1_2_1 R2_1_3 R2_2 R2_2_1 R2_3 R3 R3_1 R3_1_2 R3_1_2_1 R3_1_3 R3_2 R3_2_1 R3_3 R4 R4_1 R4_1_2 R4_1_2_1 R4_1_3 R4_2 R4_2_1 R4_3 R5 R5_1 R5_1_2 R5_1_2_1 R5_1_3 R5_2 R5_2_1 R5_3 R6 R6_1 R6_1_2 R6_1_2_1 R6_1_3 R6_2 R6_2_1 R6_3 R7 R7_1 R7_1_2 R7_1_2_1 R7_1_3 R7_2 R7_2_1 R7_3 R8 R8_1 R8_1_2 R8_1_2_1 R8_1_3 R8_2 R8_2_1 R8_3: library part RES_SMD_0805, "SMD 0805 Resistor"
SAIDA SAIDA_1 SAIDA_1_2 SAIDA_1_2_1 SAIDA_1_3 SAIDA_2 SAIDA_2_1 SAIDA_3: library part CN_KK_5, "KK_5"
U1 U1_1 U1_1_2 U1_1_2_1 U1_1_3 U1_2 U1_2_1 U1_3: "Optocoupler DC-IN 1-CH Transistor With Base DC-OUT 8-Pin PDIP", Package="DIP-8 Vishay Semiconductor", Availability=Unavailable, MF="Vishay Semiconductor", MP=6N136, Price=None, SnapEDA_Link=https://www.snapeda.com/parts/6N136/Vishay%20Semiconductor%20Opto%20Division/view-part/2773791/?ref=snap
U2 U2_1 U2_1_2 U2_1_2_1 U2_1_3 U2_2 U2_2_1 U2_3: "Half-Bridge Gate Driver IC Non-Inverting 14-DIP", Package="DIP-14 Infineon", Availability=Unavailable, MF=Infineon, MP=IR2110, Price=None, SnapEDA_Link=https://www.snapeda.com/parts/IR2110/Infineon%20Technologies/view-part/549251/?ref=snap

## Nets (pads, with @x,y where several pads share a name; then routed paths per layer and width w, separated by ;. In a path a pad name is that pad's centre, name@x,y a point inside that pad or via, vN(x,y) a via of type N, cw(c..) or ccw(c..) an arc to the next point about the centre after c; other vN are vias at no path point)
+12: C1.1 C3.1 D2.A Q1.3 R3.2 R5.2 U1.8 U2.3 U2.9 | length 115.6
  Bottom Layer w1.143: C3.1@27.559,17.446 27.776,17.229 35.015,17.229 D2.A@35.179,17.065 39.069,17.065 40.005,16.129 U2.3@44.196,16.129 47.244,13.081 47.244,10.668 49.403,8.509 U2.9@51.816,8.509 55.945,8.509 58.928,11.492 58.928,32.258 51.689,39.497 R5.2@48.641,39.497 48.641,42.966 C1.1@52.07,46.395 50.84,47.625 Q1.3@41.275,47.625 45.212,43.688 45.212,40.143 43.445,41.91 35.306,41.91 U1.8@32.131,38.735
GND: 15v.A ALIMENTACAO.2 C1.2 C2.2 C3.2 Q1.2 Q2.3 R7.2 SAIDA.2 SAIDA.4 U1.5 U2.2 U2.13 | length 73.4
  Bottom Layer w1.143: 1.778,29.083 2.921,27.94 ; SAIDA.4@5.334,27.94 2.921,27.94 ; 10.16,20.828 8.509,22.479 8.128,22.479 7.873,22.734 5.46,22.734 SAIDA.2@5.334,22.86 2.829,22.86 2.159,23.53 2.159,27.178 2.921,27.94 ; C2.2@29.972,47.07 34.765,47.07 37.86,50.165 Q1.2@41.275,50.165 46.039,50.165 47.269,51.395 C1.2@52.07,51.395 ; 35.687,20.447 36.267,20.447 37.686,19.028 43.837,19.028 U2.2@44.196,18.669 U2.13@51.816,18.669 51.796,18.689 50.581,18.689 49.911,19.359 49.911,22.993 Q2.3@43.561,29.343
H_IN: R3.1 R8.2 U1.6 U2.10 | length 54.5
  Bottom Layer w1.143: U1.6@32.131,33.655 37.211,33.655 R8.2@38.481,34.925 ; R3.1@37.592,38.989 37.592,35.814 R8.2@38.481,34.925 ; U2.10@51.816,11.049 55.299,11.049 56.642,12.392 56.642,28.262 48.771,36.133 39.689,36.133 R8.2@38.481,34.925
in_H: ENTRADA.1 R2.1 | length 7
  Bottom Layer w1.143: ENTRADA.1@5.334,38.481 5.513,38.302 11.863,38.302 R2.1@12.065,38.1 R2.1@12.002,38.036
in_H2: ENTRADA.2 U1.3 | length 20.1
  Bottom Layer w1.143: ENTRADA.2@5.334,35.941 8.678,35.941 10.964,33.655 U1.3@24.511,33.655
Net15v_K: 15v.K C2.1 Q1.1 R1.2 | length 28.3
  Bottom Layer w1.143: 15v.K@20.01,50.038 20.102,50.13 20.102,55.408 R1.2@20.193,55.499 23.622,52.07 C2.1@29.972,52.07 30.29,52.387 40.957,52.387 Q1.1@41.275,52.705
NetC4_1: C4.1 D2.K U2.6 | length 34.1
  Bottom Layer w1.143: C4.1@15.24,12.686 22.973,4.953 33.874,4.953 34.544,5.623 34.544,6.198 35.179,6.833 D2.K@35.179,7.065 35.411,7.065 36.855,8.509 U2.6@44.196,8.509
NetQ2_1: Q2.1 R5.1 U2.11 | length 28.5
  Bottom Layer w1.143: Q2.1@43.561,33.903 46.615,33.903 R5.1@48.641,31.877 54.356,26.162 54.356,14.66 53.305,13.609 51.836,13.609 U2.11@51.816,13.589
NetQ2_2: Q2.2 R8.1 | length 8.4
  Bottom Layer w1.143: R8.1@38.481,27.305 38.481,29.972 40.132,31.623 Q2.2@43.561,31.623